# Altium PCB 10515.0461_全联供输出板_V1.0.PcbDoc (part 1 of 4)
Units mm, origin at the board's own origin, x right, y up, seen from the top; angles counter-clockwise.
Board outline 141.98 x 134.8 mm, 2 copper layers (Top Layer, Bottom Layer); 149 components, 131 nets, 632 pads, 485 vias.
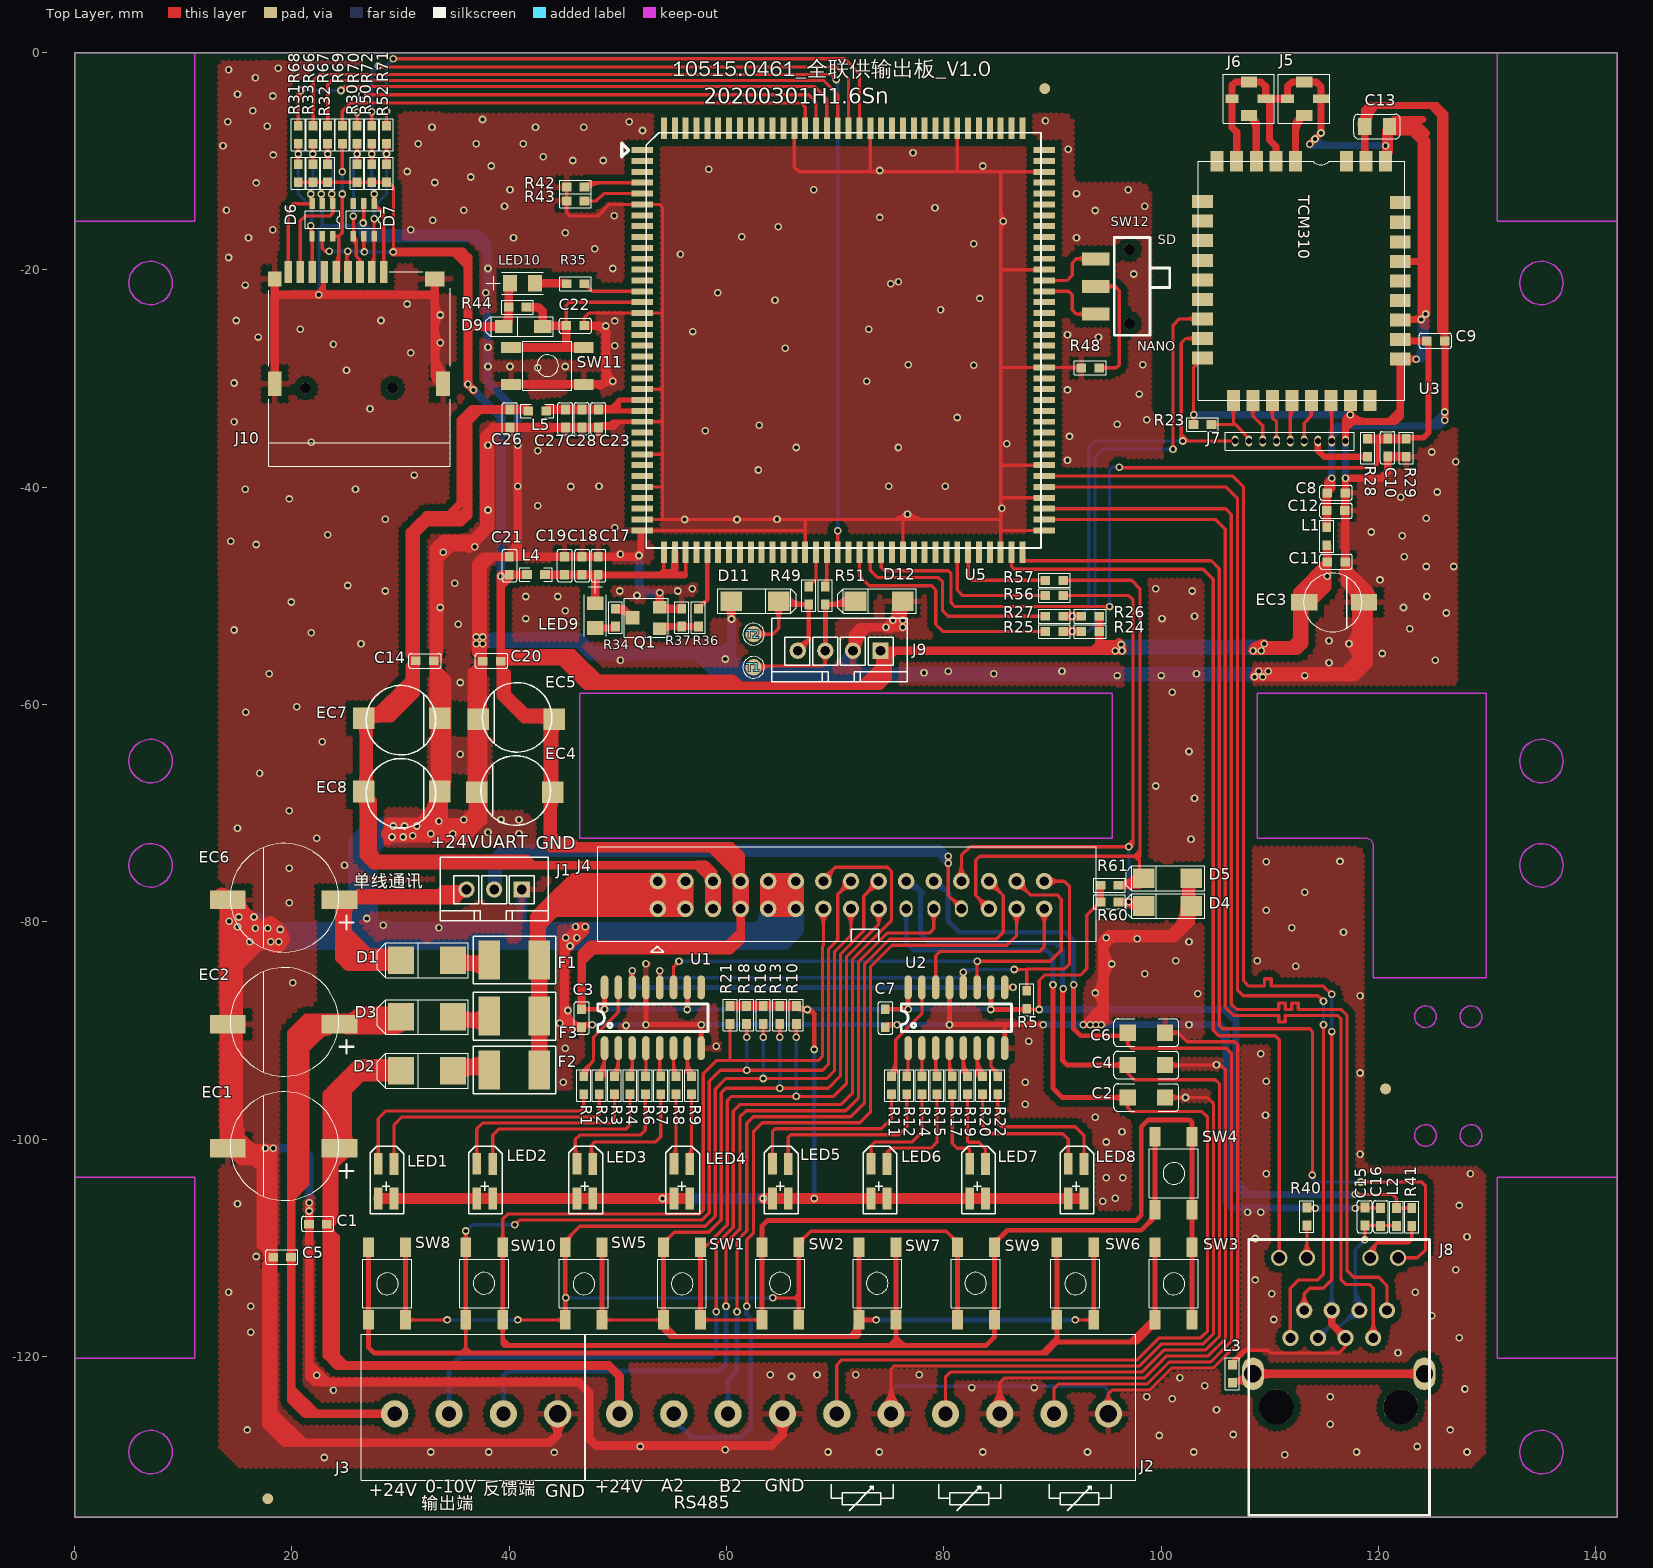
[diagram p0: Top Layer view]
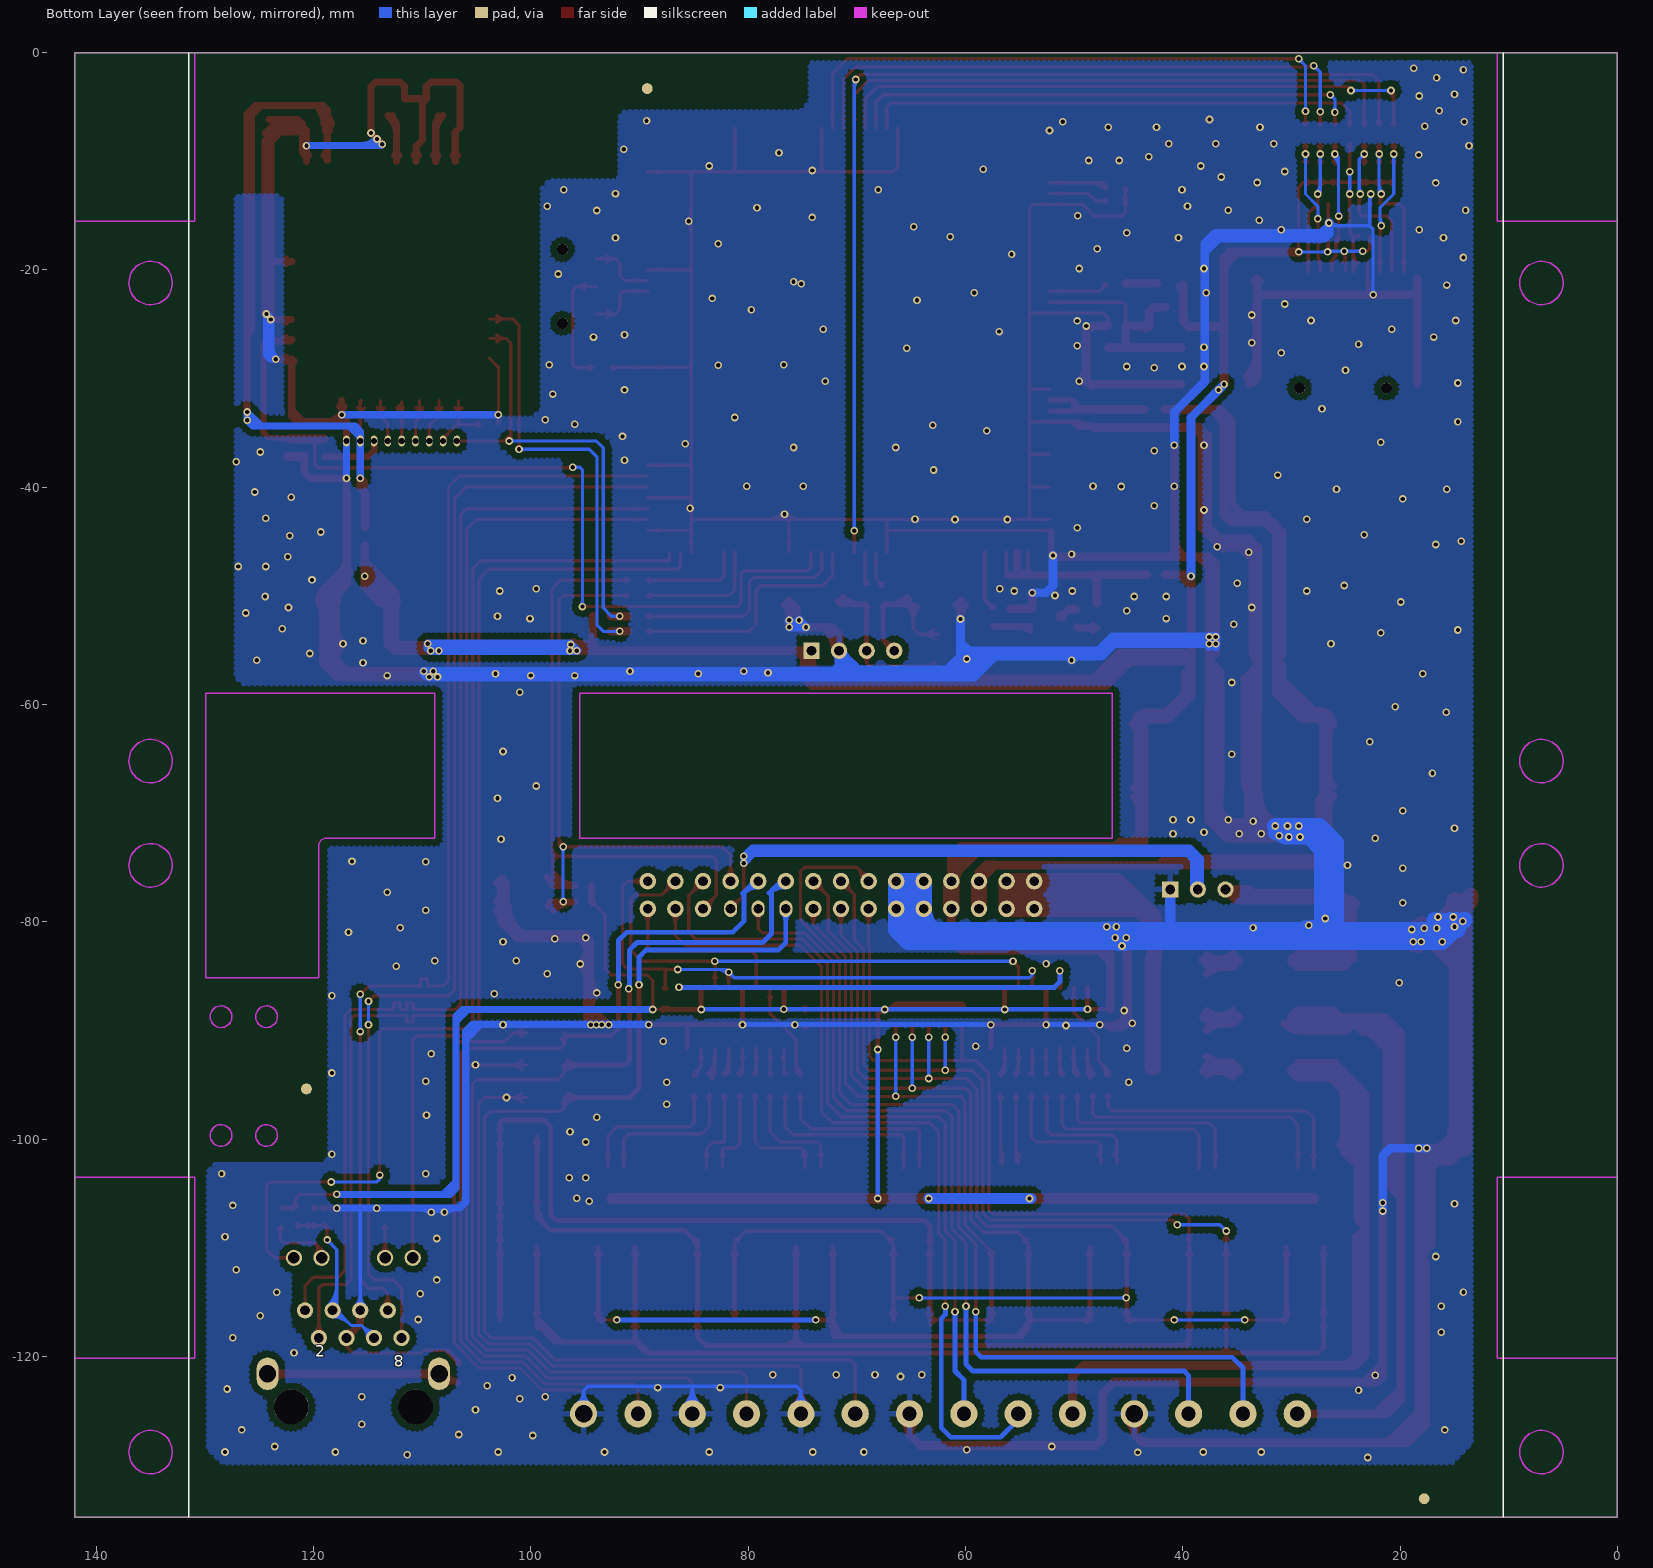
[diagram p1: Bottom Layer view, seen from below]
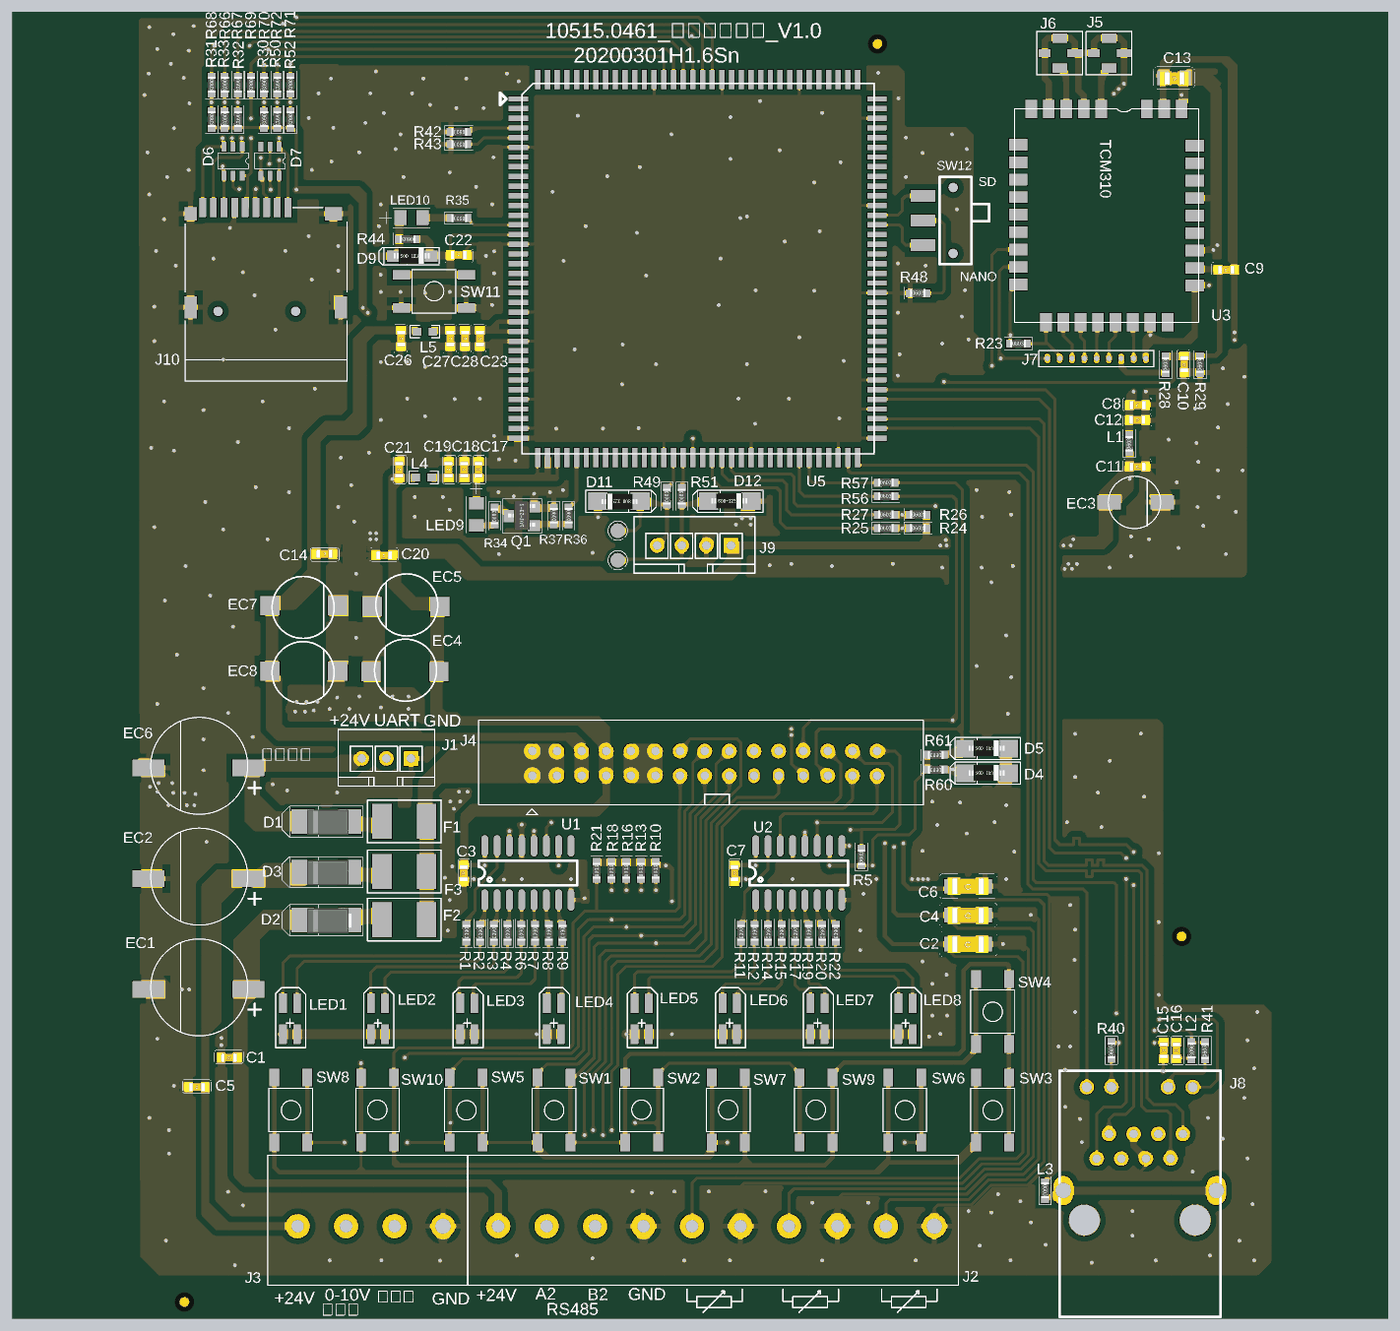
[diagram p5: 3D render of the assembled board from above, using the file's embedded part models]

## Layer stack, top to bottom
Top Layer: signal copper 0.0356
Dielectric: dielectric 0.32, FR-4, Dk 4.8
Bottom Layer: signal copper 0.0356

## Board outline
0,0 141.984,0 141.984,-134.8 0,-134.8 0,0

## Design rules (kind name [scope] priority, off if disabled: settings)
Clearance Clearance_1 [InPolygon] p1: gap=0.6
Clearance [All] p2: gap=0.254
HoleSize [All] p1 off: absolutevalues=TRUE maxlimit=2.54 minlimit=0.025 maxpercent=80.000 minpercent=20.000
HoleToHoleClearance [All] p1 off: gap=0.254 allowstackedmicrovias=TRUE
LayerPairs [All] p1 off: enforce=TRUE
MinimumSolderMaskSliver [All] p1 off: minsoldermaskwidth=0.254
NetAntennae [All] p1 off: netantennaetolerance=0
PolygonConnect PolygonConnect_1 [IsVia] p1: connectstyle=Direct reliefconductorwidth=0.254 reliefentries=4 polygonreliefangle="90 Angle"
PolygonConnect [All] p2: connectstyle=Relief reliefconductorwidth=0.5 reliefentries=4 polygonreliefangle="90 Angle"
RoutingVias [All] p1: holewidth=0.711 width=1.27 viastyle="Through Hole" minholewidth=0.711 minwidth=1.27 maxholewidth=0.711 maxwidth=1.27
SilkToSilkClearance [All] p1 off: silktosilkclearance=0.254
SilkscreenOverComponentPads [All] p1 off: minsilkscreentomaskgap=0.254
SolderMaskExpansion [All] p1: expansion=0.102
Width [All] p1: maxlimit=1.5 minlimit=0.3 preferedwidth=0.8
21 further rules are at their usual default settings.

## Classes and differential pairs
component class Mini_Mainboard_sch: C14 C17 C18 C19 C20 C21 C22 C23 C26 C27 C28 D6 D7 D9 D11 D12 EC4 EC5 EC7 EC8 J9 J10 L4 L5 LED9 LED10 Q1 R30 R31 R32 R33 R34 R35 R36 R37 R42 R43 R44 R48 R49 R50 R51 R52 R56 R57 R60 R61 R66 R67 R68 R69 R70 R71 R72 SW11 SW12 U5
component class Mini_Comm_sch: C8 C9 C10 C11 C12 C13 C15 C16 EC3 J5 J6 J7 J8 L1 L2 L3 R23 R24 R25 R26 R27 R28 R29 R40 R41 T1 T2 U3
component class Connect_Interface: C1 C2 C3 C4 C5 C6 C7 C42 C43 C44 C45 C46 C50 CX1 CY1 CY2 CY3 CY4 D1 D2 D3 D4 D5 EC1 EC2 EC6 F1 F2 F3 J1 J2 J3 J4 LED1 LED2 LED3 LED4 LED5 LED6 LED7 LED8 R1 R2 R3 R4 R5 R6 R7 R8 R9 R10 R11 R12 R13 R14 R15 R16 R17 R18 R19 R20 R21 R22 RF1 RY1 SW1 SW2 SW3 SW4 SW5 SW6 SW7 SW8 SW9 SW10 TR1 U1 U2

## Components (designator, comment, footprint, x,y, rotation, side; value= is the part's Value field where it differs from the comment)
C1 "0.1uF/0603" CAP/SMT/0603C 21.59,-107.876 r0 top
C2 "1nF/1206" CAP/SMT/1206C 96.901,-96.192 r0 top
C3 "0.1uF/0603" CAP/SMT/0603C 46.609,-88.064 r270 top
C4 "1nF/1206" CAP/SMT/1206C 96.901,-93.207 r0 top
C5 "0.1uF/0603" CAP/SMT/0603C 18.288,-110.924 r0 top
C6 "1nF/1206" CAP/SMT/1206C 96.901,-90.223 r0 top
C7 "0.1uF/0603" CAP/SMT/0603C 74.549,-88.064 r270 top
C8 "10uF/0603" CAP/SMT/0603C 115.316,-40.566 r0 top
C9 "0.1uF/0603" CAP/SMT/0603C 124.46,-26.596 r0 top
C10 "0.1uF/0603" CAP/SMT/0603C 120.904,-37.137 r90 top
C11 "0.1uF/0603" CAP/SMT/0603C 115.316,-46.916 r0 top
C12 "0.1uF/0603" CAP/SMT/0603C 116.871,-42.09 r180 top
C13 "22uF/0805" CAP/SMT/0805C 121.031,-6.784 r180 top
C14 "0.1uF/0603" CAP/SMT/0603C 33.02,-55.91 r180 top
C15 "0.1uF/0603" CAP/SMT/0603C 118.803,-107.916 r90 top
C16 "10uF/0603" CAP/SMT/0603C 120.142,-106.362 r270 top
C17 "1uF/0603" CAP/SMT/0603C 48.133,-46.433 r270 top
C18 "0.1uF/0603" CAP/SMT/0603C 46.647,-46.433 r270 top
C19 "0.1uF/0603" CAP/SMT/0603C 45.035,-46.433 r270 top
C20 "1uF/0603" CAP/SMT/0603C 37.592,-56.06 r0 top
C21 "0.1uF/0603" CAP/SMT/0603C 39.955,-46.433 r270 top
C22 "0.1uF/0603" CAP/SMT/0603C 46.863,-25.072 r180 top
C23 "0.1uF/0603" CAP/SMT/0603C 48.26,-34.47 r90 top
C26 "0.1uF/0603" CAP/SMT/0603C 40.132,-34.47 r90 top
C27 "0.1uF/0603" CAP/SMT/0603C 45.212,-34.47 r90 top
C28 "0.1uF/0603" CAP/SMT/0603C 46.736,-34.47 r90 top
D1 "1N5819" D/SMT/DO-214AC 34.798,-83.492 r0 top
D2 "1N5819" D/SMT/DO-214AC 34.798,-93.652 r0 top
D3 "1N5819" D/SMT/DO-214AC 34.798,-88.699 r0 top
D4 "SMF6.5CA/SOD-123" D/SMT/SOD123 98.171,-78.539 r0 top
D5 "SMF6.5CA/SOD-123" D/SMT/SOD123 98.171,-75.999 r0 top
D6 "SR05-4B/SOT-363" TSOT-6L 23.749,-13.896 r270 top
D7 "SR05-4B/SOT-363" TSOT-6L 27.559,-13.896 r270 top
D9 "1N4148/SOD-123" D/SMT/SOD-123 41.275,-25.199 r0 top
D11 "SMF6.5CA/SOD-123" D/SMT/SOD123 65.024,-50.472 r180 top
D12 "SMF6.5CA/SOD-123" D/SMT/SOD123 71.628,-50.472 r0 top
EC1 "220uF/50V" CAP/SMT/220UF/50V 24.384,-105.844 r180 top
EC2 "220uF/50V" CAP/SMT/220UF/50V 24.384,-94.414 r180 top
EC3 "47uF/16V" CAP/SMT/47uF/16V 113.157,-50.599 r0 top
EC4 "100uF/25V" CAP/SMT/100UF/25V 43.688,-68.202 r180 top
EC5 "100uF/25V" CAP/SMT/100UF/25V 43.815,-61.471 r180 top
EC6 "220uF/50V" CAP/SMT/220UF/50V 24.384,-82.984 r180 top
EC7 "100uF/25V" CAP/SMT/100UF/25V 26.924,-61.14 r0 top
EC8 "100uF/25V" CAP/SMT/100UF/25V 26.924,-67.871 r0 top
F1 "500MA" FUSE/100MA/SMC 42.799,-83.492 r180 top
F2 "500MA" FUSE/100MA/SMC 38.132,-93.652 r0 top
F3 "500MA" FUSE/100MA/SMC 38.132,-88.699 r0 top
J1 "CON/DIP/1X3PIN/2.54MM" CON/DIP/1×3PIN/2.54MM/插件端子 41.148,-77.015 r270 top
J2 "WJ305-5.0" CON/DIP/1×10PIN/5.0MM/WJ103-10P 72.644,-125.275 r180 top locked
J3 "WJ103-5.0" CON/DIP/1×4PIN/5.0MM/WJ103-4P 36.957,-125.275 r180 top
J4 "CON/DIP/2X15PIN" CON/DIP/2X15PIN/2.54MM 53.673,-78.793 r90 top
J5 "NC" W.FL.LP-3MM 113.157,-4.244 r270 top
J6 "Antena_W.FL-LP" W.FL.LP-3MM 108.077,-4.244 r270 top
J7 "CON/1X9PIN" CON/DIP/1×9PIN/1.27MM 116.967,-35.74 r180 top
J8 "MJ3A-B211-RSL15T022-1" RJ45-MJ3A-B211-RSL15T022-1 110.871,-110.924 r0 top locked
J9 "1X4PIN/2.54MM" CON/DIP/1×4PIN/2.54MM/插件端子 74.168,-55.044 r270 top
J10 "OTHER/MicroSD" TF-01A 26.162,-25.326 r0 top
L1 "10uH/0603/磁珠" 0603R 115.243,-44.503 r90 top
L2 "220R/0603/磁珠" 0603R 121.666,-107.164 r270 top
L3 "10uH/0603/磁珠" 0603R 106.553,-121.592 r270 top
L4 "L/10uH" L/SMT/0603L 41.656,-48.001 r0 top
L5 "L/10uH" L/SMT/0603L 41.783,-32.946 r0 top
LED1 "WEJT910C-R3H4共阳" D/SMT/WEJT910C-R3H4 27.94,-105.463 r90 top
LED2 "WEJT910C-R3H4共阳" D/SMT/WEJT910C-R3H4 37.011,-105.463 r90 top
LED3 "WEJT910C-R3H4共阳" D/SMT/WEJT910C-R3H4 46.228,-105.463 r90 top
LED4 "WEJT910C-R3H4共阳" D/SMT/WEJT910C-R3H4 55.154,-105.463 r90 top
LED5 "WEJT910C-R3H4共阳" D/SMT/WEJT910C-R3H4 64.226,-105.463 r90 top
LED6 "WEJT910C-R3H4共阳" D/SMT/WEJT910C-R3H4 73.297,-105.463 r90 top
LED7 "WEJT910C-R3H4共阳" D/SMT/WEJT910C-R3H4 82.369,-105.463 r90 top
LED8 "WEJT910C-R3H4共阳" D/SMT/WEJT910C-R3H4 91.44,-105.463 r90 top
LED9 "WEJT81GC-0805" D/SMT/LED/0805 47.752,-53.012 r90 top
LED10 "WEJT81GC-0805" D/SMT/LED/0805 42.418,-21.389 r180 top
Q1 "NPN_SS8050" BJT/SMT/SOT-23 53.848,-53.012 r90 top
R1 "1K/0603" 0603R 46.863,-95.049 r270 top
R2 "1K/0603" 0603R 48.278,-95.049 r270 top
R3 "1K/0603" 0603R 49.693,-95.049 r270 top
R4 "1K/0603" 0603R 51.108,-95.049 r270 top
R5 "10K/0603" 0603R 87.63,-87.175 r90 top
R6 "1K/0603" 0603R 52.524,-95.049 r270 top
R7 "1K/0603" 0603R 53.939,-95.049 r270 top
R8 "1K/0603" 0603R 55.354,-95.049 r270 top
R9 "1K/0603" 0603R 56.769,-95.049 r270 top
R10 "10K/0603" 0603R 66.421,-88.572 r90 top
R11 "1K/0603" 0603R 75.184,-95.049 r270 top
R12 "1K/0603" 0603R 76.581,-95.049 r270 top
R13 "10K/0603" 0603R 64.897,-88.572 r90 top
R14 "1K/0603" 0603R 77.978,-95.049 r270 top
R15 "1K/0603" 0603R 79.375,-95.049 r270 top
R16 "10K/0603" 0603R 63.373,-88.572 r90 top
R17 "1K/0603" 0603R 80.772,-95.049 r270 top
R18 "10K/0603" 0603R 61.849,-88.572 r90 top
R19 "1K/0603" 0603R 82.169,-95.049 r270 top
R20 "1K/0603" 0603R 83.566,-95.049 r270 top
R21 "10K/0603" 0603R 60.325,-88.572 r90 top
R22 "1K/0603" 0603R 84.963,-95.049 r270 top
R23 "10K/0603" 0603R 103.803,-34.216 r0 top
R24 "10K/0603" 0603R 93.472,-53.266 r0 top
R25 "100R/0603" 0603R 90.17,-53.266 r0 top
R26 "10K/0603" 0603R 93.472,-51.869 r0 top
R27 "100R/0603" 0603R 90.17,-51.869 r0 top
R28 "100R/0603" 0603R 118.999,-36.375 r90 top
R29 "10K/0603" 0603R 122.555,-36.375 r90 top
R30 "10K/0603" 0603R 25.993,-11.102 r270 top
R31 "10K/0603" 0603R 20.574,-11.102 r270 top
R32 "10K/0603" 0603R 23.283,-11.102 r270 top
R33 "10K/0603" 0603R 21.929,-11.102 r270 top
R34 "1K/0603" 0603R 49.784,-51.996 r90 top
R35 "1K/0603" 0603R 46.101,-21.262 r180 top
R36 "4.7K/0603" 0603R 57.404,-51.996 r270 top
R37 "10K/0603" 0603R 55.88,-51.996 r270 top
R40 "470R/0603" 0603R 113.411,-107.114 r90 top
R41 "470R/0603" 0603R 123.063,-107.164 r90 top
R42 "1K/0603" 0603R 46.101,-12.372 r180 top
R43 "NC 1K/0603" 0603R 46.101,-13.642 r180 top
R44 "10K/0603" 0603R 40.767,-23.421 r180 top
R48 "1K/0603" 0603R 93.472,-29.009 r0 top
R49 "100R/0603" 0603R 67.564,-49.964 r90 top
R50 "10K/0603" 0603R 27.347,-11.102 r270 top
R51 "100R/0603" 0603R 69.088,-49.964 r90 top
R52 "10K/0603" 0603R 28.702,-11.102 r270 top
R56 "100R/0603" 0603R 90.17,-49.964 r0 top
R57 "100R/0603" 0603R 90.17,-48.567 r0 top
R60 "10K/0603" 0603R 95.25,-78.158 r180 top
R61 "10K/0603" 0603R 95.25,-76.634 r180 top
R66 "22R/0603" 0603R 21.929,-7.546 r270 top
R67 "22R/0603" 0603R 23.283,-7.546 r270 top
R68 "22R/0603" 0603R 20.574,-7.546 r270 top
R69 "22R/0603" 0603R 24.638,-7.546 r270 top
R70 "22R/0603" 0603R 25.993,-7.546 r270 top
R71 "22R/0603" 0603R 28.702,-7.546 r270 top
R72 "22R/0603" 0603R 27.347,-7.546 r270 top
SW1 "KAN4542-0381A" SWITCH/KAN4542 55.848,-113.464 r90 top
SW2 "KAN4542-0381A" SWITCH/KAN4542 64.999,-113.108 r270 top
SW3 "KAN4542-0381A" SWITCH/KAN4542 101.092,-113.464 r90 top
SW4 "KAN4542-0381A" SWITCH/KAN4542 101.092,-103.304 r90 top
SW5 "KAN4542-0381A" SWITCH/KAN4542 46.799,-113.464 r90 top
SW6 "KAN4542-0381A" SWITCH/KAN4542 92.043,-113.464 r90 top
SW7 "KAN4542-0381A" SWITCH/KAN4542 73.946,-113.108 r270 top
SW8 "KAN4542-0381A" SWITCH/KAN4542 28.702,-113.464 r90 top
SW9 "KAN4542-0381A" SWITCH/KAN4542 82.994,-113.108 r270 top
SW10 "KAN4542-0381A" SWITCH/KAN4542 37.751,-113.108 r270 top
SW11 "KAN4542-0381A" SWITCH/KAN4542 43.688,-28.882 r180 top
SW12 "K3-1280S-F2" SWITCH/K3-1280S-F2 93.98,-21.516 r270 top
T1 "TEST" TEST 62.484,-56.568 r0 top
T2 "TEST" TEST 62.484,-53.52 r0 top
U1 "SN74HC595" SOP-16 48.768,-91.62 r90 top
U2 "SN74HC595" SOP-16 76.708,-91.62 r90 top
U3 "TCM_310" TCM310 112.903,-21.008 r270 top
U5 "MCU/SMT/MYCY6UL" MYC140 70.732,-26.469 r270 top locked

## Footprints (in the part's own frame and the unit in brackets; to place one, negate y for a bottom-side part, rotate by r counter-clockwise, add the part's x,y. Pads: shape width x height; smd on the part's side, far side on the other; paste and mask are expansions set on the pad)
0603R [mil]
  rect 35x32 smd: 1(-32.5,0) 2(32.5,0)
  silkscreen extent -58,-25 58,25, body extent -33,-15 30,16, height 18
BJT/SMT/SOT-23 [mm] "transistor 1base 2emitter 3collector"
  rect 1.143x1.27 smd: 1(0,0) 2(1.95,0)
  rect 1.27x1.27 smd: 3(1,2.5)
  silkscreen extent -0.78,-0.8 2.78,3.26, body extent -0.38,-0.13 2.52,2.67, height 1.2
CAP/SMT/47uF/16V [mm]
  rect 2.4x1.5 smd: 1(0.01,0.017) 2(5.5,0.017)
  silkscreen extent -0.07,-2.7 5.33,2.7
CAP/SMT/100UF/25V [mm]
  rect 2x2 smd: 1(-0.325,-0.127) 2(6.675,-0.127)
  silkscreen extent -0.1,-3.49 6.29,2.91
CAP/SMT/220UF/50V [mm]
  rect 3.3x1.7 smd: 1(0,-5) 2(10.3,-5)
  silkscreen extent -1.27,-10.21 10.08,-0.21
CAP/SMT/0603C [mil]
  rect 35x32 smd: 1(-1,1.97) 2(64,1.97)
  silkscreen extent -28,-24 89,30, body extent -20,-20 82,19, height 35
CAP/SMT/0805C [mm]
  rect 1.2x1.524 smd: 1(0.01,0.01) 2(2.296,0.01)
  silkscreen extent -0.99,-1.13 3.32,1.15, body extent -0.38,-0.64 2.62,0.76, height 0.93
CAP/SMT/1206C [mm]
  rect 1.5x1.5 smd: 1(0.026,0.025) 2(3.455,0.025)
  silkscreen extent -1.25,-1.24 4.73,1.3, body extent -0.38,-0.89 3.82,0.91, height 0.95
CON/DIP/1×3PIN/2.54MM/插件端子 [mm]
  rect 1.5x1.5 hole 0.9: 1(0,0)
  round 1.5 hole 0.9: 2(0,-2.54) 3(0,-5.08)
  silkscreen extent -2.99,-7.5 2.86,2.46
CON/DIP/1×4PIN/2.54MM/插件端子 [mm]
  rect 1.5x1.5 hole 0.9: 1(0,0)
  round 1.5 hole 0.9: 2(0,-2.54) 3(0,-5.08) 4(0,-7.62)
  silkscreen extent -2.99,-10 2.86,2.46
CON/DIP/1×4PIN/5.0MM/WJ103-4P [mm]
  round 2.5 hole 1.6: 1(-7.5,0)
  round 2.5 hole 1.3: 2(-2.5,0) 3(2.5,0) 4(7.5,0)
  silkscreen extent -10,-7.3 10.6,6.1
CON/DIP/1×9PIN/1.27MM [mm]
  oval 0.6x1 hole 0.58: 1(0,0) 2(1.27,0) 3(2.54,0) 4(3.81,0) 5(5.08,0) 6(6.35,0) 7(7.62,0) 8(8.89,0) 9(10.16,0)
  silkscreen extent -0.81,-0.81 11.05,0.86
CON/DIP/1×10PIN/5.0MM/WJ103-10P [mm]
  round 2.5 hole 1.6: 1(-22.5,0)
  round 2.5 hole 1.3: 2(-17.5,0) 3(-12.5,0) 4(-7.5,0) 5(-2.5,0) 6(2.5,0) 7(7.5,0) 8(12.5,0) 9(17.5,0) 10(22.5,0)
  silkscreen extent -25,-7.3 25.63,6.1
CON/DIP/2X15PIN/2.54MM [mil]
  round 60 hole 35.43: 1(0,0) 2(100,0) 3(0,-100) 4(100,-100) 5(0,-200) 6(100,-200) 7(0,-300) 8(100,-300) 9(0,-400) 10(100,-400) 11(0,-500) 12(100,-500) 13(0,-600) 14(100,-600) 15(0,-700) 16(100,-700) 17(0,-800) 18(100,-800) 20(100,-900) 22(100,-1000) 24(100,-1100) 25(0,-1200) 26(100,-1200) 27(0,-1300) 28(100,-1300) 29(0,-1400) 30(100,-1400)
  oval 60x47.24 hole 35.43: 19(0,-900) 21(0,-1000) 23(0,-1100)
  silkscreen extent -158,-1588 225,218
D/SMT/DO-214AC [mil]
  rect 94.49x100 smd: 1(-187.98,-2) 2(1,-2)
  silkscreen extent -274,-65 56,61, body extent -190,-55 15,47, height 40
D/SMT/LED/0805 [mil]
  rect 50x60 smd: 1(2,-6) 2(92,-6)
  silkscreen extent -28,-46 178,34
D/SMT/SOD123 [mm]
  rect 2x1.8 smd: 1(0.229,0) 2(4.597,0)
  silkscreen extent -1.4,-1.14 5.84,1.14, body extent 0.51,-0.76 4.21,0.84, height 1.2
D/SMT/SOD-123 [mm]
  rect 1.6x1.2 smd: 1(-1.8,0) 2(1.8,0)
  silkscreen extent -3.43,-0.9 2.78,0.9, body extent -1.91,-0.76 1.79,0.84, height 1.2
D/SMT/WEJT910C-R3H4 [mm]
  rect 2x0.8 smd: 1(0,0) 2(3.2,0) 3(0,-1.46) 4(3.175,-1.46)
  silkscreen extent -1.4,-2.36 4.8,0.74
FUSE/100MA/SMC [mm]
  rect 2x3.6 smd: 1(0.033,0.018) 2(4.633,0.018)
  silkscreen extent -1.47,-2.18 6.13,2.22
L/SMT/0603L [mil]
  rect 35x32 smd: 1(-1,-1) 2(64,-1)
  silkscreen extent -28,-26 91,24
MYC140 [mm]
  rect 0.55x2 smd: 1(-17.5,-18.5) 2(-16.5,-18.5) 3(-15.5,-18.5) 4(-14.5,-18.5) 5(-13.5,-18.5) 6(-12.5,-18.5) 7(-11.5,-18.5) 8(-10.5,-18.5) 9(-9.5,-18.5) 10(-8.5,-18.5) 11(-7.5,-18.5) 12(-6.5,-18.5) 13(-5.5,-18.5) 14(-4.5,-18.5) 15(-3.5,-18.5) 16(-2.5,-18.5) 17(-1.5,-18.5) 18(-0.5,-18.5) 19(0.5,-18.5) 20(1.5,-18.5) 21(2.5,-18.5) 22(3.5,-18.5) 23(4.5,-18.5) 24(5.5,-18.5) 25(6.5,-18.5) 26(7.5,-18.5) 27(8.5,-18.5) 28(9.5,-18.5) 29(10.5,-18.5) 30(11.5,-18.5) 31(12.5,-18.5) 32(13.5,-18.5) 33(14.5,-18.5) 34(15.5,-18.5) 35(16.5,-18.5) 36(17.5,-18.5) 71(17.5,18.5) 72(16.5,18.5) 73(15.5,18.5) 74(14.5,18.5) 75(13.5,18.5) 76(12.5,18.5) 77(11.5,18.5) 78(10.5,18.5) 79(9.5,18.5) 80(8.5,18.5) 81(7.5,18.5) 82(6.5,18.5) 83(5.5,18.5) 84(4.5,18.5) 85(3.5,18.5) 86(2.5,18.5) 87(1.5,18.5) 88(0.5,18.5) 89(-0.5,18.5) 90(-1.5,18.5) 91(-2.5,18.5) 92(-3.5,18.5) 93(-4.5,18.5) 94(-5.5,18.5) 95(-6.5,18.5) 96(-7.5,18.5) 97(-8.5,18.5) 98(-9.5,18.5) 99(-10.5,18.5) 100(-11.5,18.5) 101(-12.5,18.5) 102(-13.5,18.5) 103(-14.5,18.5) 104(-15.5,18.5) 105(-16.5,18.5) 106(-17.5,18.5)
  rect 2x0.55 smd: 37(19.5,-16.5) 38(19.5,-15.5) 39(19.5,-14.5) 40(19.5,-13.5) 41(19.5,-12.5) 42(19.5,-11.5) 43(19.5,-10.5) 44(19.5,-9.5) 45(19.5,-8.5) 46(19.5,-7.5) 47(19.5,-6.5) 48(19.5,-5.5) 49(19.5,-4.5) 50(19.5,-3.5) 51(19.5,-2.5) 52(19.5,-1.5) 53(19.5,-0.5) 54(19.5,0.5) 55(19.5,1.5) 56(19.5,2.5) 57(19.5,3.5) 58(19.5,4.5) 59(19.5,5.5) 60(19.5,6.5) 61(19.5,7.5) 62(19.5,8.5) 63(19.5,9.5) 64(19.5,10.5) 65(19.5,11.5) 66(19.5,12.5) 67(19.5,13.5) 68(19.5,14.5) 69(19.5,15.5) 70(19.5,16.5) 107(-19.5,16.5) 108(-19.5,15.5) 109(-19.5,14.5) 110(-19.5,13.5) 111(-19.5,12.5) 112(-19.5,11.5) 113(-19.5,10.5) 114(-19.5,9.5) 115(-19.5,8.5) 116(-19.5,7.5) 117(-19.5,6.5) 118(-19.5,5.5) 119(-19.5,4.5) 120(-19.5,3.5) 121(-19.5,2.5) 122(-19.5,1.5) 123(-19.5,0.5) 124(-19.5,-0.5) 125(-19.5,-1.5) 126(-19.5,-2.5) 127(-19.5,-3.5) 128(-19.5,-4.5) 129(-19.5,-5.5) 130(-19.5,-6.5) 131(-19.5,-7.5) 132(-19.5,-8.5) 133(-19.5,-9.5) 134(-19.5,-10.5) 135(-19.5,-11.5) 136(-19.5,-12.5) 137(-19.5,-13.5) 138(-19.5,-14.5) 139(-19.5,-15.5) 140(-19.5,-16.5)
  silkscreen extent -19.11,-20.38 19.12,18.2
RJ45-MJ3A-B211-RSL15T022-1 [mm]
  round 3.2 hole 3.2: 0(-0.25,-13.72) 0(11.18,-13.72)
  round 1.5 hole 0.9: 1(9.91,-4.83) 2(8.64,-7.37) 3(7.37,-4.83) 4(6.1,-7.37) 5(4.83,-4.83) 6(3.56,-7.37) 7(2.29,-4.83) 8(1.02,-7.37)
  round 1.5 hole 1.05: 9(0,0) 10(2.54,0) 11(8.39,0) 12(10.93,0)
  oval 2x3 hole 1.6: BO1(-2.43,-10.67) BO2(13.36,-10.67)
  silkscreen extent -2.82,-23.69 13.82,1.69
SOP-16 [mm]
  oval 2.2x0.7 smd: 1(0,0) 2(0,-1.27) 3(0,-2.54) 4(0,-3.81) 5(0,-5.08) 6(0,-6.35) 7(0,-7.62) 8(0,-8.89) 9(5.588,-8.89) 10(5.588,-7.62) 11(5.588,-6.35) 12(5.588,-5.08) 13(5.588,-3.81) 14(5.588,-2.54) 15(5.588,-1.27) 16(5.588,0)
  silkscreen extent 1.52,-9.53 4.06,0.64
SWITCH/K3-1280S-F2 [mm]
  rect 1.2x2.54 smd: 1(-2.54,0) 2(0,0) 3(2.54,0)
  round 1 hole 1 unplated: ""(-3.403,3.103) ""(3.396,3.1)
  silkscreen extent -4.5,1.7 4.5,6.8
SWITCH/KAN4542 [mm]
  rect 1.8x1 smd: 1(-3.172,-1.751) 2(3.528,-1.751) 3(3.528,1.649) 4(-3.172,1.649)
  silkscreen extent -2.07,-2.3 2.43,2.2
TCM310 [mm]
  rect 1.9x1.2 smd: 1(-11,7.75) 2(-11,5.95) 3(-11,4.15) 4(-11,-0.55) 5(-11,-2.35) 6(-11,-4.15) 7(-11,-5.95) 8(-11,-7.75) 18(11,-6.25) 19(11,-4.457) 20(11,-2.664) 21(11,-0.871) 22(11,0.921) 23(11,2.714) 24(11,4.507) 25(11,6.3)
  rect 1.2x1.9 smd: 9(-7.3,-9.1) 10(-5.5,-9.1) 11(-3.7,-9.1) 12(-1.9,-9.1) 13(-0.1,-9.1) 14(1.7,-9.1) 15(3.5,-9.1) 16(5.3,-9.1) 17(7.1,-9.1) 26(7.2,9.1) 27(5.4,9.1) 28(3.6,9.1) 29(1.8,9.1) 30(0,9.1) 31(-1.8,9.1) 32(-3.6,9.1) 33(-5.4,9.1) 34(-7.2,9.1)
  silkscreen extent -11,-9.5 11,9.5
TEST [mm]
  round 1.5 smd: 1(0,0)
  silkscreen extent -1,-1 1,1
TF-01A [mm]
  rect 0.7x2 smd: 1(2.292,5.145) 2(1.192,5.143) 3(0.096,5.145) 4(-1.004,5.145) 5(-2.103,5.145) 6(-3.201,5.145) 7(-4.297,5.145) 8(-5.395,5.145) 9(-6.499,5.145)
  rect 1.27x1.397 smd: 10(-7.747,4.507)
  rect 1.27x2.286 smd: 11(-7.747,-5.145) 12(7.747,-5.145)
  rect 1.778x1.397 smd: 13(6.985,4.507)
  round 1 hole 1 unplated: ""(-4.915,-5.557) ""(3.084,-5.554)
  silkscreen extent -8.31,-12.76 8.39,5.14
TSOT-6L [mm]
  rect 1x0.5 smd: 1(0,0) 2(0,-0.95) 3(0,-1.9) 4(3,-1.905) 5(3,-0.95) 6(3,0)
  silkscreen extent 0.63,-2.54 2.29,0.64
W.FL.LP-3MM [mm]
  rect 1x1.5 smd: 1(1.55,0) 2(-1.55,0)
  rect 0.8x1.5 smd: 3(0,1.55)
  rect 0.8x1.2 smd: 4(0,-1.55)
  silkscreen extent -2.24,-2.36 2.24,2.34

## Part data
C1 C2 C3 C4 C5 C6 C7 C8 C9 C10 C11 C12 C14 C15 C16 C17 C18 C19 C20 C21 C22 C23 C26 C27 C28: library part CAP/CAP/SMT/0603C
C13: library part CAP/CAP/SMT/0805C
D1: library part D/D/SMT/1N4007/DO-214
D2 D3: library part D/D/SMT/1N5819/DO-214
D4 D5 D11 D12: library part D/TVS/SMT/SMF13CA/SOD-123
D6 D7: library part D/TVS/SMT/SR05-4B/SOT-363
D9: library part D/D/SMT/1N4148/SOD-123, "VR=75V T(-65-175)P(0.5W)VF=0.6V"
EC1 EC2 EC6: library part CAP/AEC/DIP/330uF/25V
EC3: library part CAP/AEC/SMT/47uF/16V
EC4 EC5 EC7 EC8: library part CAP/AEC/SMT/100uF/25V
F1 F2 F3: library part FUSE/PTC/SMT/100MA
J1 J4: "Connector"
J2: library part CON/DIP/1X10PIN/WJ305-5.0, "Connector"
J3: library part CON/DIP/1X4PIN/WJ103-5.0MM, "Connector"
J5 J6: library part Antena
J7: library part CON/DIP/1X9PIN/1.27MM
J8: library part RJ45B-48F-01GY2DPL2NL, "RJ45 + MAG"
J9: library part CON/DIP/1X4PIN/2.54MM, "Connector"
L1 L2 L3: library part INDUCTOR1
L4 L5: library part L/BEAD/SMT/0603L
LED1 LED2 LED3 LED4 LED5 LED6 LED7 LED8: library part D/LED/DIP/WEJT910C-R3H4-BA共阳
LED9 LED10: library part D/LED/SMT/BL-HUF35A-TRB高亮红/0805
Q1: library part BJT/NPN/SMT/SS8050/SOT-23
R1 R2 R3 R4 R5 R6 R7 R8 R9 R10 R11 R12 R13 R14 R15 R16 R17 R18 R19 R20 R21 R22 R23 R24 R25 R26 R27 R28 R29 R30 R31 R32 R33 R40 R41 R42 R43 R44 R49 R50 R51 R52 R56 R57 R60 R61 R66 R67 R68 R69 R70 R71 R72: library part RES/RES/SMT/0603
R34 R35 R36 R37 R48: library part Res, "Resistor"
SW1 SW2 SW3 SW4 SW5 SW6 SW7 SW8 SW9 SW10 SW11: library part SWITCH/TACT/SMT/KAN4542-0381A, "4.5mm*4.5mm*3.8mm"
SW12: library part SWITCH/DIP/K3-1280S-F2
U1 U2: library part IC/TTL/SMT/SN74HC595, "8-bit serial-in,serial or parallel-out shift register with output latches;3-state"

## Free pads (board coordinates)
  round 2 on Top Solder: 0(17.78,-133.096) 0(89.281,-3.302) 0(120.65,-95.377)
  round 1 all layers, no hole: 0(17.78,-133.096) 0(89.281,-3.302) 0(120.65,-95.377)
  round 2 on Bottom Solder: 0(17.78,-133.096) 0(89.281,-3.302) 0(120.65,-95.377)

## Via types
v1: diameter 0.7, hole 0.4, Top Layer to Bottom Layer, tented both sides, 485 vias

## Nets (pads, with @x,y where several pads share a name; then routed paths per layer and width w, separated by ;. In a path a pad name is that pad's centre, name@x,y a point inside that pad or via, vN(x,y) a via of type N, cw(c..) or ccw(c..) an arc to the next point about the centre after c; other vN are vias at no path point)
485_CTRL_SELECT_0: U5.44
485_CTRL_SELECT_1: U5.45
+3.3V: C3.1 C7.1 C11.1 C20.2 C21.2 D6.5 D7.5 D9.1 EC3.1 EC4.1 EC5.1 J4.7 J4.8 J9.1 J10.4 L1.1 L2.1 L4.1 LED1.1 LED1.3 LED2.1 LED2.3 LED3.1 LED3.3 LED4.1 LED4.3 LED5.1 LED5.3 LED6.1 LED6.3 LED7.1 LED7.3 LED8.1 LED8.3 LED10.2 R5.1 R10.2 R13.2 R16.2 R18.2 R21.2 R24.2 R26.2 R30.2 R31.2 R32.2 R33.2 R41.2 R44.2 R50.2 R52.2 R60.2 R61.2 U1.10 U1.16 U2.10 U2.16 | length 709.3
  Top Layer w0.3: R31.2@20.574,-11.927 R32.2@23.283,-11.927 R30.2@25.993,-11.927 R52.2@28.702,-11.927 28.892,-11.927 29.337,-12.372 v1(29.337,-18.341) ; R31.2@20.755,-12.109 cw(c21.193,-12.547) 21.193,-11.927 cw(c21.193,-11.308) R31.2@20.755,-11.746 ; R33.2@21.747,-12.109 ccw(c21.31,-12.547) 21.31,-11.927 ccw(c21.31,-11.308) R33.2@21.747,-11.746 ; R33.2@22.11,-12.109 cw(c22.548,-12.547) 22.548,-11.927 cw(c22.548,-11.308) R33.2@22.11,-11.746 ; D6.5@22.799,-16.896 22.799,-18.026 23.048,-18.275 ; R32.2@23.102,-12.109 ccw(c22.664,-12.547) 22.664,-11.927 ccw(c22.664,-11.308) R32.2@23.102,-11.746 ; v1@23.271,-18.39 ccw(c23.048,-18.547) 23.048,-18.275 ; v1@23.271,-18.16 cw(c23.048,-18.003) 23.048,-18.275 ; v1@23.307,-18.275 23.048,-18.275 ; R32.2@23.465,-12.109 cw(c23.902,-12.547) 23.902,-11.927 cw(c23.902,-11.308) R32.2@23.465,-11.746 ; J10.4@25.019,-20.042 v1@25.019,-18.341 ; 25.019,-19.064 cw(c25.935,-19.064) v1@25.287,-18.416 ; 25.019,-18.712 ccw(c25.977,-18.712) J10.4@25.3,-19.389 ; R30.2@25.811,-12.109 ccw(c25.374,-12.547) 25.374,-11.927 ccw(c25.374,-11.308) R30.2@25.811,-11.746 ; R30.2@26.174,-12.109 cw(c26.612,-12.547) 26.612,-11.927 cw(c26.612,-11.308) R30.2@26.174,-11.746 ; v1@26.609,-18.275 D7.5@26.609,-16.896 ; 26.609,-17.711 ccw(c27.3,-17.711) v1@26.811,-18.2 ; R50.2@27.166,-12.109 ccw(c26.728,-12.547) 26.728,-11.927 ccw(c26.728,-11.308) R50.2@27.166,-11.746 ; R50.2@27.529,-12.109 cw(c27.966,-12.547) 27.966,-11.927 cw(c27.966,-11.308) R50.2@27.529,-11.746 ; R52.2@28.521,-12.109 ccw(c28.083,-12.547) 28.083,-11.927 ccw(c28.083,-11.308) R52.2@28.521,-11.746 ; v1@29.196,-18.2 ccw(c28.854,-17.858) 29.337,-17.858 ccw(c29.82,-17.858) v1@29.478,-18.2 ; R5.1@87.566,-88.064 v1(88.773,-88.064) 88.773,-85.397 89.281,-84.889 92.583,-84.889 93.154,-84.317 93.154,-79.394 R60.2@94.136,-78.412 ; R5.1@87.811,-88.22 cw(c88.188,-88.596) 88.188,-88.064 ; R5.1@87.811,-87.857 ccw(c88.31,-87.358) 88.31,-88.064 ; v1@88.632,-88.205 ccw(c88.29,-88.547) 88.29,-88.064 ccw(c88.29,-87.581) 88.632,-87.923 ccw(c88.29,-87.581) 88.773,-87.581 ccw(c89.256,-87.581) v1@88.914,-87.923 ; 93.946,-78.602 ccw(c93.502,-78.158) R60.2@94.13,-78.158 ; 93.955,-78.593 cw(c94.386,-79.024) R60.2@94.386,-78.414 ; v1(117.856,-105.082) 121.285,-105.082 121.666,-105.463 L2.1@121.666,-106.338 R41.2@123.063,-106.338 ; v1@117.997,-105.223 cw(c118.339,-105.565) 118.339,-105.082 cw(c118.339,-104.599) v1@117.997,-104.941 ; L2.1@121.485,-106.119 ccw(c121.047,-105.681) 121.666,-105.681 ccw(c122.285,-105.681) L2.1@121.847,-106.119 ; L2.1@121.847,-106.52 cw(c122.285,-106.957) 122.285,-106.338 cw(c122.285,-105.719) L2.1@121.847,-106.157 ; R41.2@122.882,-106.52 ccw(c122.444,-106.957) 122.444,-106.338 ccw(c122.444,-105.719) R41.2@122.882,-106.157
  Top Layer w0.45: C3.1@46.659,-88.039 v1(48.768,-88.039) U1.16@48.768,-86.032 ; C3.1@46.787,-88.167 cw(c47.097,-88.477) 47.097,-88.039 cw(c47.097,-87.601) C3.1@46.787,-87.91 ; v1(56.388,-88.064) U1.10@56.388,-86.032 ; R10.2@66.421,-87.746 66.738,-88.064 v1(67.437,-88.064) cw(c67.437,-86.895) R10.2@66.557,-87.665 ; v1@67.437,-88.189 cw(c67.437,-89.104) 68.084,-88.457 ; v1@67.691,-88.064 68.072,-88.445 v1(68.072,-91.747) ; C7.1@74.599,-88.039 v1(76.708,-88.039) U2.16@76.708,-86.032 ; C7.1@74.727,-88.167 cw(c75.037,-88.477) 75.037,-88.039 cw(c75.037,-87.601) C7.1@74.727,-87.91 ; U2.10@84.328,-86.032 v1(84.328,-88.064) R5.1@87.566,-88.064 ; 87.131,-88.064 ccw(c87.131,-87.539) R5.1@87.502,-87.91
  Top Layer w0.65: 43.942,-72.57 44.577,-72.57 45.827,-72.57 46.216,-72.959 46.236,-72.959 46.311,-73.034 46.482,-73.205 ; R60.2@94.424,-78.124 R61.2@94.424,-76.634
  Top Layer w0.8: v1(29.337,-18.341) 34.798,-18.341 ; 36.195,-19.611 34.925,-18.341 34.798,-18.341 ; 36.322,-25.199 D9.1@39.475,-25.199 39.941,-24.733 LED10.2@39.941,-21.376 ; v1(36.703,-31.041) v1(36.195,-30.533) 36.195,-18.849 35.687,-18.341 34.798,-18.341 ; 39.218,-49.075 40.005,-48.288 C21.2@40.005,-48.059 ; C20.2@39.26,-56.015 cw(c40.99,-57.744) 40.99,-55.298 ; C20.2@39.262,-56.012 ccw(c40.029,-56.227) 39.466,-56.791 ; D9.1@39.534,-25.058 ccw(c38.549,-24.073) 39.941,-24.073 ; 39.942,-22.268 cw(c40.986,-22.268) LED10.2@40.247,-21.53 ; L4.1@41.598,-48.059 39.218,-48.059 39.218,-55.298 ; EC5.1@43.292,-60.759 cw(c43.292,-62.086) EC5.1@44.291,-61.212 ; 43.561,-70.615 cw(c46.553,-70.615) 44.437,-68.499 ccw(c45.462,-69.524) 44.013,-69.524 ccw(c42.564,-69.524) EC4.1@43.589,-68.499 ; 43.561,-65.535 ccw(c46.553,-65.535) 44.437,-67.651 cw(c45.155,-66.933) 44.14,-66.933 ; 43.561,-64.19 cw(c46.986,-64.19) 44.564,-61.768 ccw(c45.589,-62.793) 44.14,-62.793 ccw(c42.691,-62.793) 43.716,-61.768 ccw(c42.691,-62.793) 42.691,-61.344 ccw(c42.691,-59.895) EC5.1@43.716,-60.92 ; EC5.1@43.561,-62.259 cw(c45.055,-62.259) EC5.1@43.999,-61.203 ; EC5.1@43.561,-61.923 43.561,-72.951 43.815,-73.205 46.482,-73.205 58.547,-73.205 ; EC4.1@43.589,-67.651 ccw(c42.258,-66.32) 44.14,-66.32 ; EC5.1@43.688,-61.739 ccw(c41.529,-63.628) 41.529,-60.759 ; 44.406,-73.034 46.311,-73.034 60.408,-73.034 60.579,-73.205 ; 44.577,-72.57 44.013,-72.006 EC4.1@44.013,-68.075 44.14,-67.948 EC5.1@44.14,-61.344 ; C3.1@46.659,-88.039 46.659,-82.934 47.498,-82.095 60.15,-82.095 61.293,-80.952 ; 46.659,-83.619 47.675,-82.603 48.133,-82.603 ; 46.99,-82.603 48.133,-82.603 ; 47.415,-57.628 60.579,-57.628 61.214,-58.263 ; 48.641,-58.092 45.847,-55.298 39.218,-55.298 ; R21.2@60.325,-87.746 R18.2@61.849,-87.746 R16.2@63.373,-87.746 R13.2@64.897,-87.746 R10.2@66.421,-87.746 ; 60.461,-75.119 cw(c59.328,-76.253) J4.8@60.931,-76.253 ; J4.7@61.037,-79.049 cw(c60.419,-79.667) 61.293,-79.667 cw(c62.167,-79.667) J4.7@61.549,-79.049 ; J4.8@61.037,-75.997 ccw(c60.419,-75.379) 61.293,-75.379 ccw(c62.167,-75.379) J4.8@61.549,-75.997 ; J4.7@61.293,-78.793 61.293,-81.635 60.325,-82.603 48.133,-82.603 ; J4.8@61.293,-76.253 J4.8@61.293,-75.951 ; J9.1@74.415,-54.797 ccw(c75.013,-54.199) 75.013,-55.044 ccw(c75.013,-55.889) J9.1@74.415,-55.291 ; J9.1@74.486,-54.726 cw(c73.721,-55.491) J9.1@74.803,-55.491 ; 74.803,-57.422 ccw(c71.79,-57.422) J9.1@73.921,-55.291 ; 75.438,-55.044 74.803,-55.679 74.803,-57.584 74.124,-58.263 72.39,-58.263 ; R26.2@94.297,-51.869 R24.2@94.297,-53.266 94.297,-54.472 ; 94.499,-54.472 cw(c94.499,-56.303) v1@95.793,-55.009 ; 95.07,-55.044 ccw(c95.07,-53.213) v1@96.365,-54.508 ; 95.134,-54.472 cw(c95.134,-56.303) v1@96.428,-55.009 ; v1@95.708,-55.039 cw(c96.329,-55.096) v1(96.329,-54.472) ; v1@96.119,-54.262 cw(c95.337,-55.044) v1@96.443,-55.044 ; v1@108.408,-55.039 cw(c108.966,-55.097) 108.966,-54.536 ; v1@108.423,-55.009 cw(c109.564,-56.15) v1@109.564,-54.536 ; v1@109.185,-55.009 cw(c110.326,-56.15) 110.326,-54.536 ; v1@109.439,-54.444 ccw(c110.886,-52.997) 110.886,-55.044 ; v1@109.517,-54.434 cw(c108.458,-53.819) v1(108.458,-55.044) ; EC3.1@112.373,-50.7 cw(c114.15,-50.531) 112.887,-49.269 ; 112.522,-51.898 cw(c114.033,-51.898) EC3.1@112.964,-50.829 ; EC3.1@112.522,-51.107 112.522,-49.635 ; EC3.1@112.893,-50.279 cw(c113.268,-49.635) 112.522,-49.635 ; EC3.1@112.92,-50.829 cw(c112.322,-51.427) 113.167,-51.427 cw(c114.012,-51.427) EC3.1@113.414,-50.829 ; EC3.1@112.92,-50.335 ccw(c112.322,-49.737) 113.167,-49.737 ccw(c114.012,-49.737) EC3.1@113.414,-50.335 ; EC3.1@113.169,-50.625 cw(c116.344,-50.323) 114.089,-48.068 ; EC3.1@113.617,-50.232 ccw(c113.617,-48.617) 114.759,-49.759 ; 113.88,-48.86 ccw(c115.603,-50.582) EC3.1@113.167,-50.582 ; EC3.1@113.936,-50.582 115.291,-49.227 v1(115.291,-48.186) ; EC3.1@113.965,-50.549 cw(c118.539,-50.115) C11.1@115.291,-46.866 ; 114.119,-48.621 cw(c115.291,-49.794) v1@115.291,-48.136 ; 114.533,-49.216 ccw(c115.898,-50.582) 113.967,-50.582 cw(c118.334,-50.582) 115.246,-47.494 ; 114.802,-47.938 ccw(c113.73,-46.866) C11.1@115.246,-46.866 ; v1@115.252,-48.218 cw(c115.696,-47.855) 115.291,-47.449 113.167,-49.573 EC3.1@113.167,-50.582 ; L1.1@115.291,-45.376 C11.1@115.291,-46.866 ; C20.2@39.218,-56.01 39.218,-59.21 41.352,-61.344 EC5.1@44.14,-61.344 ; C20.2@39.218,-56.01 39.218,-56.543 39.751,-57.076 39.751,-58.981 41.529,-60.759 ; C20.2@39.218,-56.01 39.218,-55.298 ; C20.2@39.218,-56.01 44.831,-56.01 ; 41.529,-60.759 43.555,-60.759 EC5.1@44.14,-61.344 ; 44.831,-56.01 45.797,-56.01 48.05,-58.263 ; 44.831,-56.01 47.084,-58.263 48.05,-58.263 ; 48.05,-58.263 61.214,-58.263 ; 58.547,-73.205 J4.8@61.293,-75.951 ; 58.547,-73.205 59.563,-73.205 ; 59.563,-73.205 60.579,-73.205 ; 59.563,-73.205 61.293,-74.935 ; 60.579,-73.205 61.293,-73.919 61.293,-74.935 ; 61.214,-58.263 72.39,-58.263 ; J4.8@61.293,-75.951 61.293,-74.935 ; 72.39,-58.263 74.168,-56.485 J9.1@74.168,-55.044 ; 72.39,-58.263 73.279,-58.263 74.168,-57.374 J9.1@74.168,-55.044 ; J9.1@73.921,-55.291 cw(c73.323,-55.889) 74.168,-55.889 ; J9.1@73.921,-55.291 cw(c73.323,-55.889) 74.168,-55.889 ; 74.168,-55.889 cw(c75.013,-55.889) J9.1@74.415,-55.291 ; 74.168,-55.889 cw(c75.013,-55.889) J9.1@74.415,-55.291 ; J9.1@74.168,-55.044 93.726,-55.044 ; 93.726,-55.044 94.297,-54.472 ; 93.726,-55.044 v1(96.393,-55.044) 96.393,-54.536 v1(96.329,-54.472) ; 94.297,-54.472 v1(96.329,-54.472) ; v1(108.458,-55.044) 112.522,-55.044 113.167,-54.399 EC3.1@113.167,-50.582 ; v1(108.458,-55.044) 108.966,-54.536 ; 108.966,-54.536 112.014,-54.536 112.522,-54.028 112.522,-51.227 EC3.1@113.167,-50.582 ; 112.522,-49.635 C11.1@115.291,-46.866 ; EC3.1@113.167,-50.582 115.291,-48.458 v1(115.291,-48.186) ; v1(115.291,-48.186) C11.1@115.291,-46.866 ; 108.909,-54.593 cw(c109.474,-55.158) 109.474,-54.359 ccw(c109.474,-55.158) 108.909,-54.593
  Top Layer w1: LED1.1@27.94,-105.463 LED2.1@37.011,-105.463 LED4.1@55.154,-105.463 LED4.3@56.261,-105.463 ; v1(63.373,-105.463) LED8.3@92.583,-105.463
  Top Layer w1.5: J4.7@61.293,-78.793 J4.8@61.293,-76.253
  Bottom Layer w0.3: v1@23.307,-18.275 v1@26.604,-18.275 ; v1@23.575,-18.416 cw(c23.917,-18.758) 23.917,-18.275 cw(c23.917,-17.792) v1@23.575,-18.134 ; v1@25.005,-18.416 ccw(c24.663,-18.758) 24.663,-18.275 ccw(c24.663,-17.792) v1@25.005,-18.134 ; v1@25.287,-18.416 cw(c25.629,-18.758) 25.629,-18.275 cw(c25.629,-17.792) v1@25.287,-18.134 ; 26.028,-18.275 cw(c26.028,-18.983) v1@26.529,-18.482 ; v1(26.67,-18.341) v1(29.337,-18.341) ; v1@26.811,-18.482 cw(c27.153,-18.824) 27.153,-18.341 cw(c27.153,-17.858) v1@26.811,-18.2 ; v1@29.196,-18.482 ccw(c28.854,-18.824) 28.854,-18.341 ccw(c28.854,-17.858) v1@29.196,-18.2
  Bottom Layer w0.45: v1(48.768,-88.039) v1(76.708,-88.039) v1@84.328,-88.039 ; 56.025,-88.039 cw(c56.025,-88.427) v1@56.3,-88.152 ; v1@56.476,-88.152 cw(c56.751,-88.427) 56.751,-88.039 ; 67.074,-88.039 cw(c67.074,-88.427) v1@67.349,-88.152 ; v1@67.525,-88.152 cw(c67.8,-88.427) 67.8,-88.039 ; v1(68.072,-105.463) v1(68.072,-91.747) ; 83.965,-88.039 cw(c83.965,-88.427) v1@84.24,-88.152
  Bottom Layer w0.65: v1(88.773,-88.064) 105.791,-88.064 ; 106.895,-103.9 108.077,-105.082 ; 106.895,-89.168 105.791,-88.064 ; v1(117.856,-105.082) 108.077,-105.082 ; 105.791,-88.064 106.299,-88.064 106.895,-88.66 106.895,-104.535 107.442,-105.082 108.077,-105.082
  Bottom Layer w0.8: v1@36.322,-30.66 39.243,-33.581 v1(39.243,-48.186) ; v1@96.294,-54.508 ccw(c97.589,-53.213) 97.589,-55.044 ; v1@96.358,-55.009 cw(c97.805,-56.456) 97.805,-54.409 ; v1@96.379,-54.477 cw(c95.758,-54.42) v1(95.758,-55.044) ; 107.046,-54.409 cw(c107.046,-56.456) v1@108.493,-55.009 ; 107.808,-54.409 cw(c107.808,-56.456) v1@109.255,-55.009 ; v1@108.415,-55.019 cw(c109.474,-55.634) v1(109.474,-54.409) ; v1(95.758,-55.044) v1(109.22,-55.044) 109.474,-54.79 v1(109.474,-54.409) ; v1(95.758,-55.044) 96.393,-54.409 v1(109.474,-54.409)
  Bottom Layer w1: v1@53.975,-105.463 v1(63.373,-105.463)
  other v1: 54.102,-105.463 23.434,-18.275 25.146,-18.275
+3.3VD: C17.2 C18.2 C19.2 L4.2 LED9.2 U5.37 U5.38 U5.39 | length 25.7
  Top Layer w0.3: 53.721,-48.059 54.229,-47.551 54.229,-47.424 ; U5.37@54.144,-46.782 cw(c53.937,-46.989) 54.229,-46.989 ; 54.229,-47.678 54.229,-47.424 ; 54.229,-47.003 cw(c54.541,-47.003) U5.37@54.32,-46.782 ; U5.37@54.232,-45.969 54.229,-45.972 54.229,-47.424 ; 54.242,-47.665 55.232,-47.665 ; 55.232,-48.059 55.33,-48.157 56.232,-48.157 U5.39@56.232,-45.969 ; U5.39@56.144,-46.782 cw(c55.93,-46.996) 56.232,-46.996 cw(c56.534,-46.996) U5.39@56.32,-46.782
  Top Layer w0.65: C17.2@48.183,-48.059 55.232,-48.059 ; U5.38@55.232,-45.969 55.232,-47.665 55.232,-48.059 ; 56.105,-48.059 55.232,-48.059
  Top Layer w0.8: L4.2@43.314,-48.059 C19.2@45.085,-48.059 C18.2@46.697,-48.059 C17.2@48.183,-48.059 ; LED9.2@47.904,-50.675 C17.2@47.904,-48.338 ; 47.904,-48.785 cw(c48.871,-48.785) C17.2@48.188,-48.102
+5V: C14.2 C26.2 EC7.1 EC8.1 J4.5 J4.6 L5.1 | length 203.7
  Top Layer w0.8: EC7.1@26.435,-61.153 cw(c27.429,-61.842) EC7.1@27.429,-60.632 ; EC8.1@26.74,-67.857 cw(c25.071,-69.526) 27.432,-69.526 ; EC8.1@27.023,-68.422 ccw(c28.048,-69.447) 26.599,-69.447 ccw(c25.15,-69.447) EC8.1@26.175,-68.422 ; EC8.1@27.023,-67.574 cw(c28.048,-66.549) 26.599,-66.549 cw(c25.15,-66.549) 26.175,-67.574 ccw(c24.059,-65.458) 27.051,-65.458 ; EC7.1@27.023,-60.843 ccw(c28.048,-59.818) 28.048,-61.267 ccw(c28.048,-62.716) 27.023,-61.691 ccw(c28.048,-62.716) 26.599,-62.716 ccw(c25.15,-62.716) 26.175,-61.691 cw(c24.059,-63.807) 27.051,-63.807 ; 27.051,-70.538 ccw(c24.059,-70.538) EC8.1@26.175,-68.422 ; EC7.1@27.051,-61.267 27.051,-74.348 ; EC7.1@27.092,-61.608 cw(c28.956,-62.898) 28.956,-60.632 ; 27.432,-71.458 ccw(c23.139,-71.458) EC8.1@26.175,-68.422 ; 30.861,-58.727 30.861,-56.493 C14.2@31.394,-55.96 ; 30.861,-57.171 cw(c32.568,-57.171) C14.2@31.361,-55.964 ; 30.861,-56.688 cw(c31.633,-56.688) C14.2@31.359,-55.966 ; 30.861,-54.749 ccw(c32.568,-54.749) C14.2@31.361,-55.955 ; 31.115,-57.457 27.305,-61.267 EC7.1@26.599,-61.267 ; 31.394,-58.194 28.956,-60.632 ; 31.394,-44.249 32.41,-43.233 35.56,-43.233 36.195,-42.598 36.195,-41.963 ; 34.417,-42.598 35.56,-41.455 35.56,-33.835 36.551,-32.844 C26.2@40.082,-32.844 ; L5.1@41.631,-32.844 C26.2@40.082,-32.844 ; 42.164,-74.777 41.608,-74.221 28.019,-74.221 27.432,-73.634 27.432,-68.831 EC8.1@26.599,-67.998 ; J4.6@58.391,-76.253 ccw(c57.517,-76.253) 58.135,-75.635 ccw(c58.753,-75.017) J4.6@58.753,-75.891 ; EC8.1@26.599,-67.998 EC7.1@26.599,-61.267 ; EC8.1@26.599,-67.998 26.599,-73.896 27.051,-74.348 ; EC7.1@26.599,-61.267 29.083,-61.267 31.394,-58.956 C14.2@31.394,-55.96 ; EC7.1@26.599,-61.267 26.67,-61.267 27.305,-60.632 28.956,-60.632 ; 27.051,-74.348 27.48,-74.777 57.277,-74.777 ; C14.2@31.394,-55.96 31.394,-43.589 ; C14.2@31.394,-55.96 30.861,-55.427 30.861,-44.122 31.394,-43.589 ; 31.394,-43.589 32.385,-42.598 35.56,-42.598 36.195,-41.963 ; 36.195,-41.963 36.195,-33.962 37.313,-32.844 C26.2@40.082,-32.844 ; 57.277,-74.777 J4.6@58.753,-76.253 58.753,-75.443 58.039,-74.729 57.277,-74.729 57.277,-74.777
  Top Layer w1.5: J4.5@58.753,-78.793 J4.6@58.753,-76.253
+5V1: C23.2 C27.2 C28.2 L5.2 U5.24 U5.25 | length 16.1
  Top Layer w0.45: C23.2@48.335,-32.969 50.038,-32.969 ; C23.2@48.338,-32.935 cw(c49.049,-33.646) 49.049,-32.64 ; C23.2@48.338,-32.754 ccw(c48.857,-32.236) 48.857,-32.969 ; C23.2@48.414,-32.64 49.478,-32.64 ; 49.149,-32.969 49.478,-32.64 ; 49.53,-32.969 49.634,-32.969 50.038,-32.565 ; U5.25@52.232,-32.969 50.038,-32.969 ; U5.24@52.232,-31.969 50.126,-31.969 50.038,-32.057 ; 49.478,-32.64 50.038,-32.08 50.038,-32.057 ; 50.038,-32.969 50.038,-32.565 ; 50.038,-32.565 50.038,-32.057
  Top Layer w0.8: L5.2@43.536,-32.844 C27.2@45.162,-32.844 C28.2@46.686,-32.844 C23.2@48.21,-32.844
+24V: F1.1 F2.2 F3.2 J4.1 J4.2 J4.3 J4.4 | length 86.3
  Top Layer w0.8: F1.1@42.341,-82.286 ccw(c41.317,-81.262) 42.766,-81.262 ccw(c44.214,-81.262) F1.1@43.19,-82.286 ; F1.1@42.766,-83.51 42.766,-80.604 44.577,-78.793
  Top Layer w1.5: F1.1@42.639,-83.51 42.639,-79.588 45.974,-76.253 J4.2@53.673,-76.253 ; F2.2@42.766,-93.398 F1.1@42.766,-83.51 ; 50.271,-77.396 cw(c50.271,-82.195) J4.1@53.665,-78.801 ; 50.885,-77.396 ccw(c50.885,-73.465) J4.2@53.665,-76.245 ; 52.811,-77.396 cw(c52.811,-82.195) J4.3@56.205,-78.801 ; 53.425,-77.396 ccw(c53.425,-73.465) J4.4@56.205,-76.245 ; J4.2@53.683,-76.246 ccw(c55.832,-74.813) 55.832,-77.396 ; J4.1@53.684,-78.798 cw(c55.832,-79.743) 55.832,-77.396 ; J4.1@53.673,-78.793 43.434,-78.793 44.831,-77.396 55.832,-77.396 ; J4.1@53.673,-78.793 J4.3@56.213,-78.793 J4.4@56.213,-76.253 J4.2@53.673,-76.253 ; J4.1@53.673,-78.793 J4.2@53.673,-76.253
+24VA: C1.2 D2.1 EC1.1 J2.10 | length 143.5
  Top Layer w0.8: 23.216,-102.069 cw(c24.092,-102.069) EC1.1@23.756,-101.26 ; 23.216,-98.868 ccw(c25.56,-98.868) EC1.1@23.902,-100.526 ; C1.2@23.249,-107.821 ccw(c21.736,-106.308) 23.876,-106.308 ; C1.2@23.253,-107.82 ccw(c23.221,-107.166) 23.876,-107.166 ; C1.2@23.26,-107.826 ccw(c24.408,-107.826) 23.596,-108.638 ; EC1.1@23.266,-100.526 ccw(c22.099,-99.359) 23.749,-99.359 ; EC1.1@23.749,-101.273 23.749,-95.303 ; EC1.1@24.066,-100.526 ccw(c23.298,-99.758) 24.384,-99.758 ccw(c25.47,-99.758) EC1.1@24.702,-100.526 ; 24.638,-96.065 26.416,-94.287 ; EC1.1@24.866,-100.526 ccw(c24.189,-99.849) 25.146,-99.849 ; 24.892,-120.83 24.003,-119.941 24.003,-109.044 23.216,-108.257 ; 25.146,-99.666 ccw(c26.362,-99.666) EC1.1@25.502,-100.526 ; 26.605,-93.017 cw(c26.605,-97.051) D2.1@29.458,-94.198 ; 26.851,-94.287 ccw(c26.851,-90.6) D2.1@29.458,-93.207 ; 28.537,-93.017 cw(c28.537,-95.119) D2.1@30.023,-93.633 ; 28.782,-94.287 ccw(c28.782,-92.531) D2.1@30.023,-93.773 ; D2.1@29.338,-93.017 26.035,-93.017 25.019,-94.033 ; D2.1@29.439,-94.287 26.416,-94.287 ; D2.1@29.458,-94.268 ccw(c28.092,-95.634) 28.092,-93.703 ccw(c28.092,-91.771) D2.1@29.458,-93.137 ; D2.1@30.023,-93.703 25.349,-93.703 25.019,-94.033 ; J2.10@50.144,-125.275 50.144,-121.825 49.149,-120.83 24.13,-120.83 23.216,-119.916 23.216,-108.257 ; 23.216,-108.257 C1.2@23.216,-107.826 ; C1.2@23.216,-107.826 23.876,-107.166 ; C1.2@23.216,-107.826 23.216,-103.05 ; 23.216,-103.05 23.216,-102.012 EC1.1@24.384,-100.844 24.384,-94.668 ; 23.216,-103.05 23.216,-95.836 23.749,-95.303 ; 23.749,-95.303 24.384,-94.668 ; 23.876,-107.166 23.876,-102.415 25.146,-101.145 25.146,-94.922 25.781,-94.287 26.416,-94.287 ; 24.384,-94.668 25.019,-94.033 ; 23.216,-102.82 cw(c25.56,-102.82) 23.902,-101.162 ccw(c25.56,-102.82) 23.216,-102.82
+24VA2: D1.1 EC6.1 J1.3 | length 81.1
  Top Layer w0.8: EC6.1@24.066,-78.302 cw(c23.298,-79.07) 24.384,-79.07 cw(c25.47,-79.07) EC6.1@24.702,-78.302 ; EC6.1@24.866,-78.302 cw(c24.189,-78.979) 25.146,-78.979 ; 25.146,-80.952 27.178,-82.984 ; 25.146,-79.162 cw(c26.362,-79.162) EC6.1@25.502,-78.302 ; EC6.1@25.343,-77.563 ccw(c25.599,-76.88) 26.115,-77.396 ; EC6.1@25.502,-77.666 ccw(c26.27,-76.898) 26.27,-77.984 ccw(c26.27,-79.07) EC6.1@25.502,-78.302 ; 26.035,-83.543 25.146,-82.654 25.146,-81.46 ; 26.605,-82.857 cw(c26.605,-86.891) D1.1@29.458,-84.038 ; 26.851,-84.127 ccw(c26.851,-80.44) D1.1@29.458,-83.047 ; 27.69,-77.396 ccw(c27.69,-80.49) EC6.1@25.502,-78.302 ; 28.537,-82.857 cw(c28.537,-84.959) D1.1@30.023,-83.473 ; 28.782,-84.127 ccw(c28.782,-82.371) D1.1@30.023,-83.613 ; D1.1@29.338,-82.857 26.035,-82.857 25.146,-81.968 25.146,-81.46 ; D1.1@29.439,-84.127 25.146,-84.127 24.384,-83.365 24.384,-82.222 ; D1.1@29.458,-84.108 ccw(c28.092,-85.474) 28.092,-83.543 ccw(c28.092,-81.611) D1.1@29.458,-82.977 ; D1.1@30.023,-83.543 25.197,-83.543 24.384,-82.73 24.384,-82.222 ; 30.741,-77.643 ccw(c30.143,-78.241) 30.143,-77.396 35.687,-77.396 J1.3@36.068,-77.015 ; 33.528,-77.396 33.909,-77.015 J1.3@36.068,-77.015 ; 24.384,-82.222 EC6.1@24.384,-77.984 ; EC6.1@24.384,-77.984 30.4,-77.984 ; EC6.1@24.384,-77.984 25.527,-77.984 26.115,-77.396 ; EC6.1@24.384,-77.984 25.146,-78.746 25.146,-80.825 25.146,-81.46 ; 26.115,-77.396 30.988,-77.396 30.4,-77.984 ; 30.4,-77.984 35.099,-77.984 J1.3@36.068,-77.015
+24VB: C5.2 D3.1 EC2.1 J3.4 | length 162.7
  Top Layer w0.8: 20.447,-92.509 21.209,-91.747 ; EC2.1@22.744,-90.212 cw(c23.584,-91.052) EC2.1@23.584,-89.864 ; EC2.1@22.846,-90.11 ccw(c22.149,-89.414) EC2.1@23.134,-89.414 ; EC2.1@23.074,-90.096 ccw(c23.074,-89.188) EC2.1@23.904,-89.556 ; EC2.1@23.173,-89.232 cw(c21.844,-88.643) 21.844,-90.096 ; EC2.1@23.241,-89.706 ccw(c21.336,-91.329) 21.336,-88.826 ; EC2.1@23.266,-89.732 ccw(c22.498,-90.5) 22.498,-89.414 ccw(c22.498,-88.328) EC2.1@23.266,-89.096 ; EC2.1@24.937,-89.167 cw(c27.292,-91.522) 27.292,-88.191 ; EC2.1@25.318,-89.969 ccw(c25.318,-84.114) D3.1@29.458,-88.254 ; EC2.1@25.634,-89.414 cw(c27.312,-89.414) 26.125,-88.228 ; 26.658,-89.414 ccw(c26.658,-85.454) D3.1@29.458,-88.254 ; 26.912,-88.191 cw(c26.912,-91.791) D3.1@29.458,-89.245 ; 27.249,-89.969 ccw(c27.249,-86.045) 30.023,-88.82 cw(c28.589,-87.385) 28.589,-89.414 ; 27.61,-89.969 cw(c27.61,-86.988) 25.502,-89.096 ccw(c26.27,-88.328) 26.27,-89.414 ccw(c26.27,-90.5) EC2.1@25.502,-89.732 ; 27.69,-88.826 ccw(c27.69,-91.92) EC2.1@25.502,-89.732 ; 28.077,-88.826 ccw(c28.077,-86.873) D3.1@29.458,-88.254 ; 28.107,-88.826 cw(c28.107,-90.736) D3.1@29.458,-89.385 ; 28.804,-89.969 24.939,-89.969 EC2.1@24.384,-89.414 ; D3.1@28.843,-88.191 cw(c28.843,-89.86) D3.1@30.023,-88.68 ; D3.1@29.18,-89.969 ccw(c29.18,-87.977) D3.1@30.589,-89.385 ; D3.1@29.223,-88.191 ccw(c29.223,-93.453) EC2.1@25.502,-89.732 ; J3.4@29.457,-125.275 22.225,-125.275 ; D3.1@29.465,-88.191 26.162,-88.191 24.939,-89.414 EC2.1@24.384,-89.414 ; D3.1@29.947,-88.826 EC2.1@25.781,-88.826 ; D3.1@30.023,-88.75 29.359,-89.414 EC2.1@24.384,-89.414 ; 19.939,-122.989 19.939,-91.112 ; 19.939,-122.989 22.225,-125.275 ; 19.939,-122.989 19.939,-124.005 21.209,-125.275 22.225,-125.275 ; 19.939,-91.112 21.637,-89.414 EC2.1@24.384,-89.414 ; 19.939,-91.112 19.939,-90.223 21.336,-88.826 ; 21.209,-91.747 EC2.1@23.542,-89.414 ; 21.209,-91.747 21.209,-104.066 19.939,-105.336 20.447,-104.828 20.447,-91.493 21.844,-90.096 ; 21.336,-88.826 EC2.1@25.781,-88.826 ; 21.844,-90.096 22.86,-90.096 EC2.1@23.542,-89.414 ; EC2.1@23.542,-89.414 EC2.1@24.384,-89.414 ; EC2.1@23.542,-89.414 EC2.1@24.384,-89.414 ; EC2.1@24.384,-89.414 25.193,-89.414 EC2.1@25.781,-88.826
EARTH: J8.BO1 J8.BO2 L3.2 | length 33.3
  Top Layer w0.3: L3.2@106.686,-122.16 ccw(c106.899,-121.811) 107.188,-122.1 ; L3.2@106.734,-122.599 cw(c107.172,-123.037) 107.172,-122.417 cw(c107.172,-121.798) L3.2@106.734,-122.236 ; L3.2@106.806,-122.423 cw(c107.188,-122.488) 107.188,-122.1 ; L3.2@106.87,-122.1 107.188,-122.1 ; 107.216,-122.072 cw(c107.853,-122.71) J8.BO1@108.476,-122.058 ; 107.222,-122.383 cw(c107.809,-122.971) J8.BO1@108.295,-122.297 ; 107.433,-121.855 cw(c108.065,-122.488) J8.BO1@108.683,-121.841 ; J8.BO1@107.593,-122.038 cw(c107.188,-122.012) 107.188,-122.417 ; J8.BO1@107.694,-121.594 107.188,-122.1 ; J8.BO1@107.834,-122.689 ccw(c107.188,-123.321) 107.188,-122.417 ; 107.188,-122.417 L3.2@106.553,-122.417 106.87,-122.417 107.188,-122.1 ; 107.188,-122.417 107.617,-122.417 J8.BO1@108.441,-121.594 108.011,-121.594 107.188,-122.417
  Top Layer w0.8: J8.BO1@108.441,-121.594 J8.BO2@124.231,-121.594 ; J8.BO1@108.865,-122.018 cw(c109.89,-123.043) 109.89,-121.594 cw(c109.89,-120.145) J8.BO1@108.865,-121.17 ; J8.BO2@123.807,-122.018 ccw(c122.783,-123.042) 122.783,-121.594 ccw(c122.782,-120.145) J8.BO2@123.807,-121.17
FEEDBACK_VOLTAGE: J3.2 J4.21 | length 84.4
  Top Layer w0.3: v1@59.803,-115.228 ccw(c59.461,-114.886) 59.944,-114.886 ccw(c60.427,-114.886) v1@60.085,-115.228 ; v1@59.944,-115.242 59.944,-109.57 61.23,-108.284 61.23,-97.954 61.811,-97.373 70.955,-97.373 72.15,-96.178 72.15,-83.648 74.765,-81.033 78.659,-81.033 79.073,-80.619 J4.21@79.073,-78.793 ; J4.21@78.755,-79.273 cw(c77.987,-80.041) 79.073,-80.041 cw(c80.159,-80.041) J4.21@79.391,-79.273
  Bottom Layer w0.45: J3.2@39.457,-125.275 39.457,-121.759 39.878,-121.338 59.309,-121.338 59.944,-120.703 v1@59.944,-115.242
  other v1: 59.944,-115.369